# EAGLE board iot_dice (EAGLE 9.6.2)
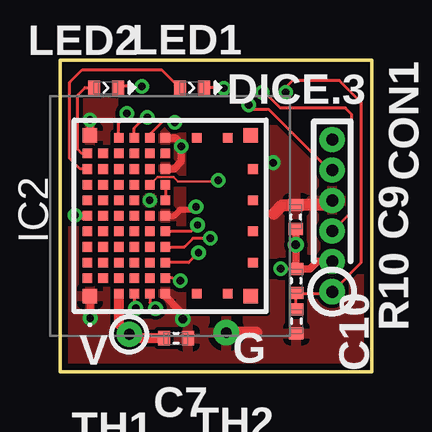
[diagram p0: board, top side]
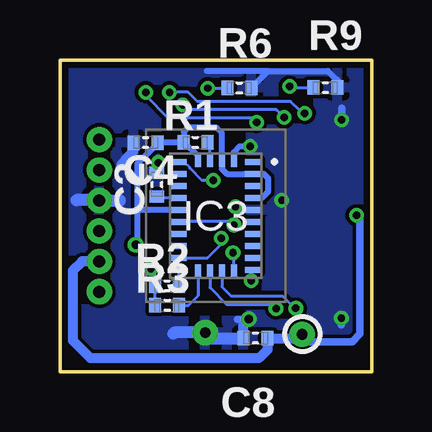
[diagram p1: board, bottom side, seen from below]

Size 13 x 13 mm. Coordinates in mm from the lower left corner, seen from the top.
Outline: 0,0 0,13 13,13 13,0 0,0
Copper layers (1*16): Top 0.035mm / dielectric 1.5mm / Bottom 0.035mm
Design rules "SeeedStudio_2layer_DRU_no_angle_20140221 *": minimum track width 4mil, minimum drill 12mil, track to track 6mil, track to pad 6mil, pad to pad 6mil, via to via 6mil, smd to smd 0mil, copper to edge 10mil, drill to drill 10mil, minimum pad ring 10mil, minimum via ring 6mil, stop-mask expansion 2mil, vias tented up to drill 100mil, thermal gap 10mil
tRestrict: area 5.4,2.4 to 8.7,10.6; 1 lines
bRestrict: area 5.4,2.4 to 8.7,10.6

## Footprints (pad centres in the part's own frame; a part is rotated, then mirrored left to right if it is on the bottom)
1005K = smd 0.5 x 0.6: 1 -0.5,0; 2 0.5,0
1X6IDC_1R27 = drill 0.5 pad 1.05: 1 -3.81,0; 2 -2.54,0; 3 -1.27,0; 4 0,0; 5 1.27,0; 6 2.54,0
ISP2053AXRS = smd 0.6 x 0.6: A1 -3.35,3.35; A11 3.35,3.35; L1 -3.35,-3.35; L11 3.35,-3.35 | smd 0.4 x 0.4: A2 -2.6,3.45; A3 -1.95,3.45; A4 -1.3,3.45; A5 -0.65,3.45; A6 0,3.45; A7 0.65,3.45; A8 1.3,3.45; A9 1.95,3.45; A10 2.6,3.45; B2 -2.6,2.8; B3 -1.95,2.8; B4 -1.3,2.8; B5 -0.65,2.8; B6 0,2.8; B7 0.65,2.8; B8 1.3,2.8; B9 1.95,2.8; B10 2.6,2.8; C1 -3.25,2.15; C2 -2.6,2.15; C3 -1.95,2.15; C4 -1.3,2.15; C5 -0.65,2.15; C6 0,2.15; C7 0.65,2.15; C8 1.3,2.15; C9 1.95,2.15; C10 2.6,2.15; C11 3.25,2.15; D1 -3.25,1.5; D2 -2.6,1.5; D3 -1.95,1.5; D4 -1.3,1.5; D5 -0.65,1.5; D6 0,1.5; D7 0.65,1.5; D8 1.3,1.5; D9 1.95,1.5; D10 2.6,1.5; D11 3.25,1.5; E1 -3.25,0.85; E2 -2.6,0.85; E3 -1.95,0.85; E4 -1.3,0.85; E5 -0.65,0.85; E6 0,0.85; E7 0.65,0.85; E8 1.3,0.85; E9 1.95,0.85; E10 2.6,0.85; E11 3.25,0.85; F1 -3.25,0.2; F2 -2.6,0.2; F3 -1.95,0.2; F4 -1.3,0.2; F5 -0.65,0.2; F6 0,0.2; F7 0.65,0.2; F8 1.3,0.2; F9 1.95,0.2; F10 2.6,0.2; F11 3.25,0.2; H1 -3.25,-1.1; H11 3.25,-1.1; K1 -3.25,-2.4; K11 3.25,-2.4; L3 -1.95,-3.45; L5 -0.65,-3.45; L7 0.65,-3.45; L9 1.95,-3.45
BNO085 = smd 0.675 x 0.25: 1 1.563,2.25; 6 -1.563,2.25; 7 -1.563,1.75; 8 -1.563,1.25; 9 -1.563,0.75; 10 -1.563,0.25; 11 -1.563,-0.25; 12 -1.563,-0.75; 13 -1.563,-1.25; 14 -1.563,-1.75; 15 -1.563,-2.25; 20 1.563,-2.25; 21 1.563,-1.75; 22 1.563,-1.25; 23 1.563,-0.75; 24 1.563,-0.25; 25 1.563,0.25; 26 1.563,0.75; 27 1.563,1.25; 28 1.563,1.75 | smd 0.25 x 0.575: 2 0.75,2.313; 3 0.25,2.313; 4 -0.25,2.313; 5 -0.75,2.313; 16 -0.75,-2.313; 17 -0.25,-2.313; 18 0.25,-2.313; 19 0.75,-2.313
1005K-LED = smd 0.5 x 0.6: A -0.5,0; K 0.5,0
03C = drill 0.45 pad 1.05: 1 0,0

## Placement (x,y rotation side)
C2  0.1u  [1005K]  8.96,7.8 90 bottom
C4  0.1u  [1005K]  9.43,9.54 180 bottom
C7  1u  [1005K]  4.84,1.39 0 top
C8  0.1u  [1005K]  4.84,1.39 180 bottom
C9  0.1u  [1005K]  9.84,6.45 90 top
C10  1u  [1005K]  9.86,2.1 270 top
CON1  PINH6IDC  [1X6IDC_1R27]  11.36,7.14 90 top
IC2  ISP2053-AX-RS  [ISP2053AXRS]  4.6,6.5 90 top
IC3  BNO085  [BNO085]  6.5,6.5 0 bottom
LED1  LED1005  [1005K-LED]  5.51,11.84 0 top
LED2  LED1005  [1005K-LED]  1.92,11.84 0 top
R1  10k  [1005K]  7.35,9.56 0 bottom
R2  2.2k  [1005K]  8.53,3.58 0 bottom
R3  2.2k  [1005K]  8.52,2.77 0 bottom
R6  2.2k  [1005K]  5.52,11.84 0 bottom
R9  2.2k  [1005K]  1.92,11.85 0 bottom
R10  10k  [1005K]  9.85,3.79 270 top
TH1  [03C]  2.89,1.55 0 top
TH2  [03C]  6.94,1.63 0 top

## Library data of the parts
C2 C4 C7-C10 CON1 LED1 LED2 R1-R3 R6 R9 R10 TH1 TH2 = dac
IC2 = SamacSys_Parts; DESCRIPTION: Bluetooth Modules - 802.15.1 ISP2053-AX nRF5340 Bluetooth 5.2 LE Audio, DF and Long Range Module; HEIGHT: 1mm; MANUFACTURER_NAME: Insight SIP; MANUFACTURER_PART_NUMBER: ISP2053-AX-RS; MOUSER_PART_NUMBER: 359-ISP2053-AX-RS; MOUSER_PRICE-STOCK: https://www.mouser.co.uk/ProductDetail/Insight-SiP/ISP2053-AX-RS?qs=pBJMDPsKWf1vrfOoG2vJ6g%3D%3D
IC3 = SamacSys_Parts; DESCRIPTION: Board Mount Motion & Position Sensors 9-axis IMU; HEIGHT: 1.18mm; MANUFACTURER_NAME: CEVA; MANUFACTURER_PART_NUMBER: BNO085; MOUSER_PART_NUMBER: 526-BNO085; MOUSER_PRICE-STOCK: https://www.mouser.co.uk/ProductDetail/CEVA/BNO085?qs=ulEaXIWI0c9BFVeZDQCmmQ%3D%3D

## Nets
+3V3: C4.1 C7.1 C8.1 C9.1 CON1.2 IC2.A6 IC2.C1 IC3.3 IC3.5 IC3.10 IC3.26 IC3.28 R1.1 R2.1 R3.1 R10.1 TH1.1
CAM_ON: IC2.E3
CLK: IC2.C9
CS: IC2.D1 IC3.18
GND: C2.2 C4.2 C7.2 C8.2 C9.2 C10.2 CON1.4 IC2.A1 IC2.A11 IC2.E7 IC2.F1 IC2.F6 IC2.F9 IC2.F11 IC3.2 IC3.25 R6.2 R9.2 TH2.1
INT: IC2.B3
LED1: IC2.A9 LED1.A
LED2: IC2.A10 LED2.A
MISO: IC2.F2 IC3.20
MOSI: IC2.E1 IC3.17
N$1: LED2.K R9.1
N$2: IC2.F7 IC2.F8
N$3: LED1.K R6.1
N$4: C2.1 IC3.9
N$5: IC3.4 R1.2
N$6: IC3.15 R2.2
N$7: IC3.16 R3.2
N$16: IC2.A4
N$18: IC2.A5
N$33: IC2.A2
NINT: IC2.F4 IC3.14
NRST: C10.1 CON1.1 IC2.E11 R10.2
PCLK: IC2.B2
RST: IC2.F5 IC3.11
SCK: IC2.F3 IC3.19
SCL: IC2.A3
SDA: IC2.B10
SPI0: IC2.C2
SPI1: IC2.C5
SWCLK: CON1.5 IC2.D11
SWDIO: CON1.3 IC2.C11
VBAT: IC2.F10
WAKE: IC2.E8 IC3.6
Y2: IC2.A8
Y3: IC2.B9
Y6: IC2.B7

## Tracks (layer width: path | path; a pad name or v marks a point on that pad's centre or on a via)
+3V3  (via drill 0.3 pad 0.4, 0.31, 0.35)
  Top 0.127: v9.21,4.29 R10.1
  Top 0.305: C9.1 9.84,5.93 v9.84,5.29 R10.1 | IC2.A6 0.65,6.5 v0.63,6.52 | R10.1 10.43,4.29 10.74,4.6 CON1.2
  Top 0.406: C8.1 3.05,1.39 TH1.1 2.45,2 IC2.C1
  Bottom 0.127: R3.1 9.02,3.57 R2.1 9.03,4.17 9.15,4.29 v9.21,4.29
  Bottom 0.254: IC3.5 7.25,8.99 7.82,9.56 7.83,9.56 | 7.83,9.56 R1.1 8.91,9.56 C4.1 | IC3.26 4.57,7.25 4.32,7.5 4.32,8.07 4.5,8.25 IC3.28 5.29,8.25 5.3,8.24 6.04,8.24 6.25,8.45 IC3.3 6.25,9.96 6.46,10.17 7.67,10.17 7.83,10.01 7.83,9.56 | C4.1 8.8,9.54 8.79,9.56 | v9.84,5.29 9.77,5.36 9.77,6.7 | C4.1 8.93,9.51 9.77,8.67 9.77,6.7 | 9.77,6.7 9.72,6.75 IC3.10
  Bottom 0.305: v0.64,6.51 v0.63,6.52 0.48,6.38 0.48,1.57 0.81,1.24 2.58,1.24 TH1.1
  Bottom 0.406: TH1.1 3.05,1.39 C8.1 4.34,0.92 4.7,0.55 11.73,0.55 12.47,1.29 12.47,4.21 12.08,4.6 CON1.2
CS  (via drill 0.31)
  Top 0.127: IC2.D1 3.1,2.7 v3.16,2.64
  Bottom 0.127: IC3.18 6.25,3.54 5.86,3.15 3.71,3.15 3.2,2.64 v3.16,2.64
GND  (via drill 0.3, 0.31, 0.35)
  Top 0.102: IC2.E7 | IC2.F6
  Top 0.127: IC2.E7 v3.74,7.15
  Top 0.254: IC2.F6 4.76,6.5 5.01,6.75 5.55,6.75 v5.68,6.88
  Top 0.305: IC2.A1 1.25,2.86 1.26,2.85 v1.26,2.23 | IC2.A11 v1.25,10.5 | IC2.F9 4.75,8.45 5.06,8.76 v5.06,9.4 5.06,9.51 4.82,9.75 IC2.F11 | IC2.F1 4.4,3.13 5.04,2.49 5.04,2.26 v5.12,2.18
  Top 0.508: 8.92,6.58 9.29,6.95 C9.2 11.16,6.94 CON1.4 | TH2.1 8.19,1.63
  Bottom 0.127: C2.2 8.96,8.65 v8.89,8.71
  Bottom 0.254: 1.45,12.17 1.82,12.54 4.31,12.54 | R6.2 4.31,12.54 | 4.31,12.54 6.87,12.54 6.88,12.54 | IC3.2 5.75,9.15 5.51,9.4 v5.06,9.4 | v5.68,6.88 5.55,6.75 IC3.25
  Bottom 0.305: v1.26,2.23 1.26,1.95 | v1.25,10.5 1.25,11 | v5.06,9.4 5.1,9.36 | 1.45,12.17 1.45,11.87 R9.2 | 5.6,2.17 5.13,2.17 v5.12,2.18
  Bottom 0.406: C8.2 5.34,1.96 5.13,2.17 | C4.2 9.93,9.2 10.25,8.87 10.25,8.82 10.44,8.63
  Bottom 0.508: 12.32,7.15 CON1.4 11.34,7.12 10.51,7.12 10.51,7.15 | 8.27,1.59 8.23,1.63 TH2.1 6.71,1.39 C8.2
  pour Top (isolate 0.1): 0.02,0.02 12.98,0.02 12.98,13.1 0.02,13.1
  pour Bottom (isolate 0.1): 0.02,0.02 12.98,0.02 12.98,13.1 0.02,13.1
LED1
  Top 0.127: IC2.A9 0.85,8.45 0.41,8.89 0.41,12.07 0.93,12.59 4.24,12.59 4.99,11.84 LED1.A
LED2
  Top 0.127: IC2.A10 0.91,9.1 0.73,9.28 0.73,11.53 1.04,11.84 LED2.A
MISO  (via drill 0.3)
  Top 0.127: v5.02,3.79 4.81,3.79 4.7,3.9 IC2.F2
  Bottom 0.127: IC3.20 5.02,4.17 v5.02,3.79
MOSI  (via drill 0.31)
  Top 0.127: v3.99,2.63 3.75,2.87 IC2.E1
  Bottom 0.127: v3.99,2.63 4.06,2.63 4.23,2.81 6.05,2.81 6.75,3.51 IC3.17
N$1  (via drill 0.3)
  Top 0.127: LED2.K 2.75,11.92 3.41,11.92 3.42,11.91 v3.42,11.89
  Bottom 0.127: v3.42,11.89 3.38,11.85 R9.1
N$2
  Top 0.127: IC2.F8 IC2.F7
N$3  (via drill 0.3)
  Top 0.127: v6.83,11.82 6.8,11.84 LED1.K
  Bottom 0.127: v6.83,11.82 v6.82,11.83 R6.1
N$4
  Bottom 0.127: IC3.9 8.91,7.25 C2.1
N$5
  Bottom 0.127: IC3.4 6.75,9.46 R1.2
N$6
  Bottom 0.127: R2.2 8.03,4.22 IC3.15
N$7
  Bottom 0.127: R3.2 7.64,2.77 7.25,3.16 IC3.16
NINT  (via drill 0.3)
  Top 0.127: v6.27,5.56 5.55,5.56 5.19,5.2 IC2.F4
  Bottom 0.127: IC3.14 6.85,4.75 6.27,5.33 v6.27,5.56
NRST  (via drill 0.3 pad 0.4)
  Top 0.127: 3.75,9.9 4.3,10.45 4.75,10.45 v4.8,10.4 | v9.42,11.65 9.42,11.86 9.7,12.14 11.66,12.14 12.55,11.25 12.55,4.52 CON1.1 | C10.1 R10.2 9.87,3.27 11.29,3.27
  Top 0.15: IC2.E11 3.75,9.9
  Top 0.152: 11.29,3.27 CON1.1
  Bottom 0.127: v4.8,10.4 4.98,10.58 8.48,10.58 9.41,11.51
  Bottom 0.15: v9.42,11.65 v9.42,11.64 9.41,11.63 9.41,11.51
RST  (via drill 0.3)
  Top 0.127: v5.74,6.11 5.47,5.85 IC2.F5
  Bottom 0.127: v5.74,6.11 5.75,6.11 5.92,6.28 8.03,6.28 IC3.11
SCK  (via drill 0.3)
  Top 0.127: v5.78,4.96 5.37,4.55 IC2.F3
  Bottom 0.127: IC3.19 5.75,4.93 v5.78,4.96
SWCLK  (via drill 0.3)
  Top 0.127: IC2.D11 3.1,10.15 3.55,10.6 v3.65,10.6 | v7.88,11.12 8.07,10.93 8.72,10.93 11.24,8.41 CON1.5
  Bottom 0.127: v3.65,10.6 3.97,10.92 7.63,10.92 7.83,11.12 v7.88,11.12
SWDIO  (via drill 0.3, 0.3 pad 0.4)
  Top 0.127: IC2.C11 2.45,10.35 2.79,10.69 v2.79,10.77 | CON1.3 12.15,6.66 12.15,10.75 11.91,10.99 9.19,10.99 8.53,11.65 v8.43,11.65
  Bottom 0.127: v2.79,10.77 2.89,10.77 3.22,11.11 3.23,11.11 3.38,11.26 7.26,11.26 7.67,11.67 8.41,11.67 v8.43,11.65
WAKE  (via drill 0.3)
  Top 0.102: IC2.E8 3.88,7.93 3.89,7.93 4.08,8.12 4.73,8.12 4.93,7.92 6.55,7.92 v6.61,7.98
  Bottom 0.127: IC3.6 7.82,8.75 7.58,8.51 7.58,8.48 7.08,7.98 v6.61,7.98

## Text on the board
tPlace: DICE.3 | V | G